# EAGLE board Stoplight Feather PCB v22 no trace (EAGLE 9.6.2)

Size 71.12 x 73.66 mm. Coordinates in mm from the lower left corner, seen from the top.
Outline: 0,73.66 71.12,73.66 71.12,0 0,0 0,73.66
Copper layers (1*16): Top 0.035mm / dielectric 1.5mm / Bottom 0.035mm
Design rules "OthermillDRC_1_32_v2": minimum track width 8mil, minimum drill 0.8mm, track to track 0.794003125mm, track to pad 0.794003125mm, pad to pad 0.794003125mm, via to via 0.794003125mm, smd to smd 0mil, copper to edge 0mil, drill to drill 1mil, minimum pad ring 10mil, minimum via ring 10mil, stop-mask expansion 1mil, vias tented up to drill 30mil, thermal gap 10mil
Net classes: 0 default: width 0.61 mm, drill 0.61 mm, clearance 0.61 mm
Holes 3 mm at 7.62,66.04 7.62,5.08 65.99,5.08 65.99,66.04

## Footprints (pad centres in the part's own frame; a part is rotated, then mirrored left to right if it is on the bottom)
CAP-PTH-2.54 = drill 1.016 pad 1.651 long: 1 -2.54,0; 2 1.27,0
TO220V = drill 1.016 long: 1 -2.54,-2.54; 2 0,-2.54; 3 2.54,-2.54
DIL18 = drill 1.016 pad 1.651 long: 1 -10.16,-3.81; 2 -7.62,-3.81; 3 -5.08,-3.81; 4 -2.54,-3.81; 5 0,-3.81; 6 2.54,-3.81; 7 5.08,-3.81; 8 7.62,-3.81; 9 10.16,-3.81; 10 10.16,3.81; 11 7.62,3.81; 12 5.08,3.81; 13 2.54,3.81; 14 0,3.81; 15 -2.54,3.81; 16 -5.08,3.81; 17 -7.62,3.81; 18 -10.16,3.81
1X03 = drill 1.016 pad 1.651 long: 1 0,0; 2 2.54,0; 3 5.08,0
POWER_JACK_PTH = drill 2.997 pad 4.318: GND 0,7.7; GNDBREAK 4.7,10.7; PWR 0,13.7
1X02 = drill 1.016 pad 1.88 long: 1 0,0; 2 2.54,0
FEATHERWING = drill 1.016 pad 1.651 long: 1 6.35,1.27; 2 8.89,1.27; 3 11.43,1.27; 4 13.97,1.27; 5 16.51,1.27; 6 19.05,1.27; 7 21.59,1.27; 8 24.13,1.27; 9 26.67,1.27; 10 29.21,1.27; 11 31.75,1.27; 12 34.29,1.27; 13 36.83,1.27; 14 39.37,1.27; 15 41.91,1.27; 16 44.45,1.27; 17 44.45,21.59; 18 41.91,21.59; 19 39.37,21.59; 20 36.83,21.59; 21 34.29,21.59; 22 31.75,21.59; 23 29.21,21.59; 24 26.67,21.59; 25 24.13,21.59; 26 21.59,21.59; 27 19.05,21.59; 28 16.51,21.59

## Placement (x,y rotation side)
C1  22pF  [CAP-PTH-2.54]  45.72,31.75 270 top
C3  22pF  [CAP-PTH-2.54]  48.39,25.4 90 top
IC2  7805TV  [TO220V]  35.56,30.48 90 top
IC3  [DIL18]  48.96,47.12 0 top
J1  [1X03]  36.29,60.96 0 top
J2  POWER_JACK  [POWER_JACK_PTH]  41.91,6.35 0 top
J3  [1X02]  55.88,60.96 180 top
MS1  FEATHERWING  [FEATHERWING]  31.75,7.62 90 top

## Library data of the parts
C1 C3 = Capacitor Long Pads; PROD_ID: CAP-09128
IC2 = linear
IC3 = ULN2803 Long Pads
J1 = 3 pin header Long pad
J2 = SparkFun-Connectors; PROD_ID: CONN-08197
J3 = 2 Pin Connector Long Pads
MS1 = Feather Huzzah Long Pads

## Nets
3.3V: C1.1 IC2.3
5V: C3.1 IC2.1 IC3.10 J2.PWR J3.1
GND: C1.2 C3.2 IC2.2 IC3.9 J2.GND J3.2 MS1.4
GREEN: IC3.1 MS1.17
N$1: J2.GNDBREAK
N$2: IC3.18 J1.1
N$3: IC3.17 J1.2
N$4: IC3.16 J1.3
RED: IC3.3 MS1.18
YELLOW: IC3.2 MS1.20

## Tracks (layer width: path | path; a pad name or v marks a point on that pad's centre or on a via)
3.3V  (1 unrouted)
5V  (4 unrouted)
GND  (6 unrouted)
GREEN  (1 unrouted)
N$2  (1 unrouted)
N$3  (1 unrouted)
N$4  (1 unrouted)
RED  (1 unrouted)
YELLOW  (1 unrouted)